# Altium PCB PCB4.PcbDoc (part 2 of 4)
Units mm, origin at the board's own origin, x right, y up, seen from the top; angles counter-clockwise.
Board outline 297 x 150 mm, 2 copper layers (Top Layer, Bottom Layer); 237 components, 147 nets, 681 pads, 111 vias.
Unrouted connection lines stored in the file: 7.
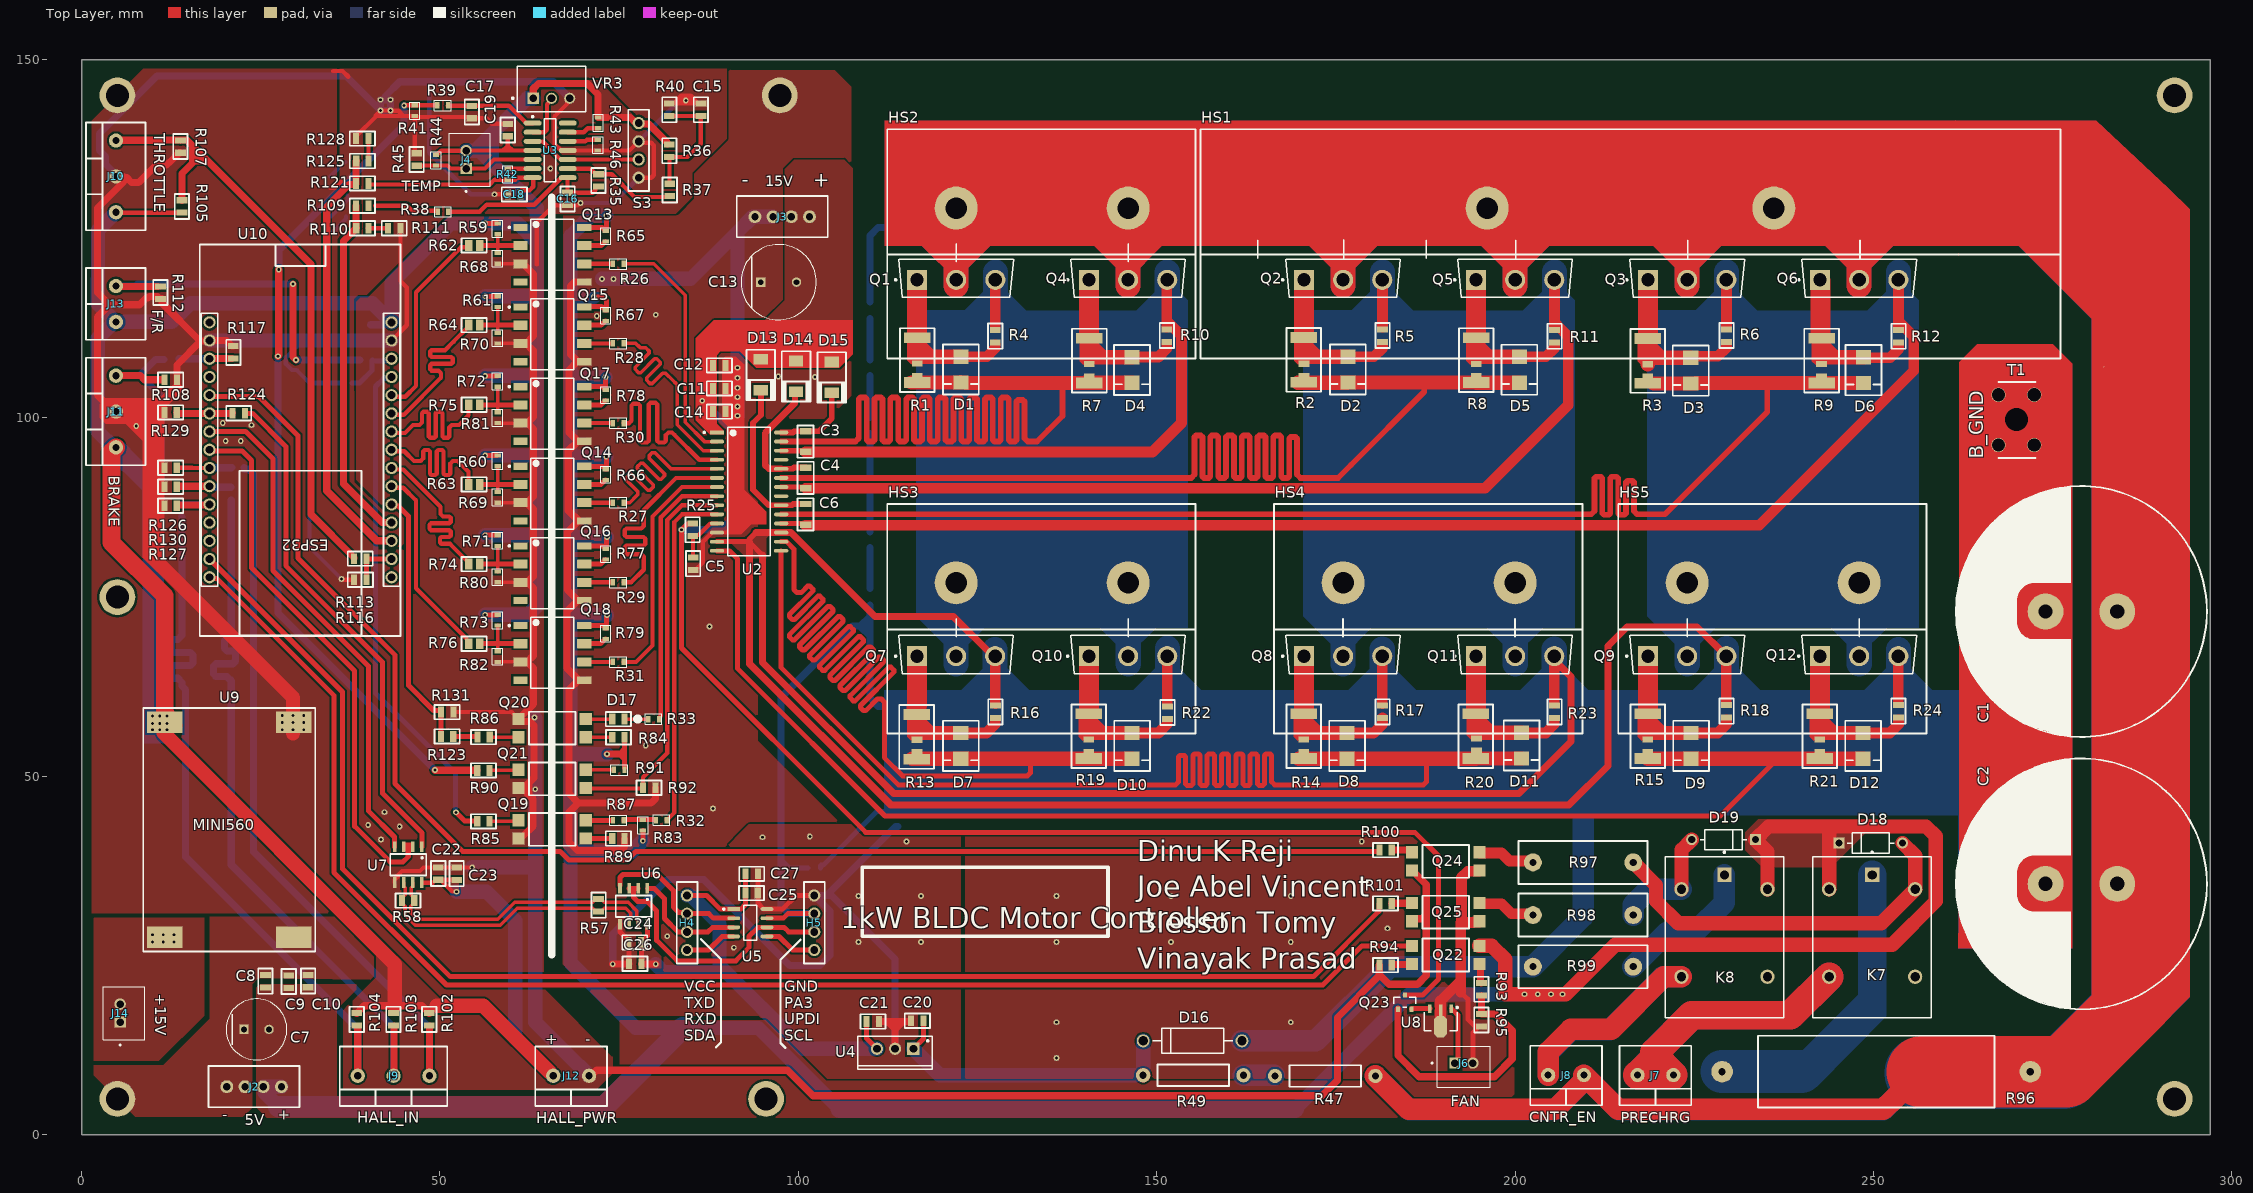
[diagram p0: Top Layer view]

## Free pads (board coordinates) (continued)
  rect 1.5x0.85 smd: 1(116.55,55.107) 1(116.586,107.602) 1(140.5,55.125) 1(140.6,107.525) 1(170.5,55.125) 1(170.558,107.567) 1(194.558,107.55) 1(194.6,55.3) 1(218.5,55.125) 1(218.5,107.5) 1(242.5,55.125) 1(242.75,107.525) 2(116.55,53.375) 2(116.586,105.87) 2(140.5,53.393) 2(140.6,105.793) 2(170.5,53.393) 2(170.558,105.835) 2(194.558,105.818) 2(194.6,53.568) 2(218.5,53.393) 2(218.5,105.768) 2(242.5,53.393) 2(242.75,105.793)

## Via types
v1: diameter 0.8, hole 0.4, Top Layer to Bottom Layer, 111 vias

## Nets (pads, with @x,y where several pads share a name; then routed paths per layer and width w, separated by ;. In a path a pad name is that pad's centre, name@x,y a point inside that pad or via, vN(x,y) a via of type N, cw(c..) or ccw(c..) an arc to the next point about the centre after c; other vN are vias at no path point)
15V_GND: C5.2 C7.1 C8.2 C9.2 C10.2 C11.1 C12.2 C13.1 C14.2 J2.3 J2.4 J3.3 J3.4 J6.2 pad.1@5,5 pad.1@97.409,145 Q13.5 Q14.5 Q15.5 Q16.5 Q17.5 Q18.5 Q24.3 Q25.3 R89.1 R92.1 R95.1 U2.12 U8.2 U9.2 | length 216.1
  Top Layer w0.6: C5.2@85.488,78.818 85.65,78.818 86.675,79.843 86.675,82.725 87.554,83.603 87.578,83.603 87.985,84.01 U2.12@88.647,84.01 ; U2.12@88.647,84.025 89.925,84.025
  Top Layer w0.7: C5.2@85.325,78.818 C5.2@85.65,78.818 ; 192.2,20.117 192.417,19.9 193.4,18.917 193.4,16.1 194.3,15.2 195.225,15.2 R95.1@195.3,15.125 195.225,15.05 194.9,15.05 194.1,14.25 J6.2@194.1,10
  Top Layer w1: Q16.5@69.231,74.531 67.7,73 67.7,65.1 69.378,63.422 Q18.5@70.125,63.422 ; Q15.5@69.234,107.866 68.2,108.9 68.2,118.373 68.786,118.959 70.117,118.959 Q13.5@70.125,118.967 ; Q18.5@69.322,63.422 68,62.1 68,47.6 69.3,46.3 ; Q14.5@69.34,85.64 67.8,84.1 67.8,76 69.269,74.531 Q16.5@70.125,74.531 ; Q14.5@70.125,85.64 70.117,85.648 69.352,85.648 67.9,87.1 67.9,95.414 Q17.5@69.243,96.757 ; Q17.5@70.125,96.749 70.117,96.757 Q17.5@69.243,96.757 ; Q15.5@70.125,107.858 69.158,107.858 68,106.7 68,98 Q17.5@69.243,96.757 ; R89.1@75.766,41.33 75.766,40.261 75.18,39.675 69.169,39.675 68,40.844 68,45 69.3,46.3 ; R92.1@80.05,48.4 80.05,46.886 79.464,46.3 69.3,46.3
  Top Layer w1.5: U8.2@189.6,15.1 U8.2@189.6,17.4 189.6,18.7 189.617,18.7 192.417,21.5 ; 192.417,19.9 192.417,21.5 ; 192.5,29.761 192.5,35.896 193.379,36.775 194.925,36.775 195.015,36.865 Q24.3@195.015,36.88 ; Q25.3@195.015,29.78 195.015,29.765 194.925,29.675 194.276,29.675 194.201,29.6 192.417,29.6 192.417,21.5
  Bottom Layer w2: v1(72.6,119.4) 84.947,119.4 91.5,125.953 ; v1(91.5,100.3) v1(91.5,102.9) v1(91.5,104.2) v1(91.5,105.6) v1(91.5,107) 91.5,125.953 ; J3.3@96.475,128.075 93.622,128.075 91.5,125.953
  other v1: 136,10.7 136,15.7 168.7,15.7 136,26.9 152,26.9 168.7,26.9 182.2,28.8 136,33.3 152,33.3 168.7,33.3 178.6,40.9 88.1,45.5 78.7,54.3 87.6,70.9 91.5,101.6 102.3,105.7 97.2,105.8 71.874,114.211 80.1,114.4 74.2,119.4 75.8,119.4